# Altium PCB 20240828_VC_MM.PcbDoc
Units mm, origin at the board's own origin, x right, y up, seen from the top; angles counter-clockwise.
Board outline 85 x 55 mm, 2 copper layers (Top Layer, Bottom Layer), stack 0.67 mm thick; 7 components, 6 nets, 20 pads, 2 vias.
Unrouted connection lines stored in the file: 1.
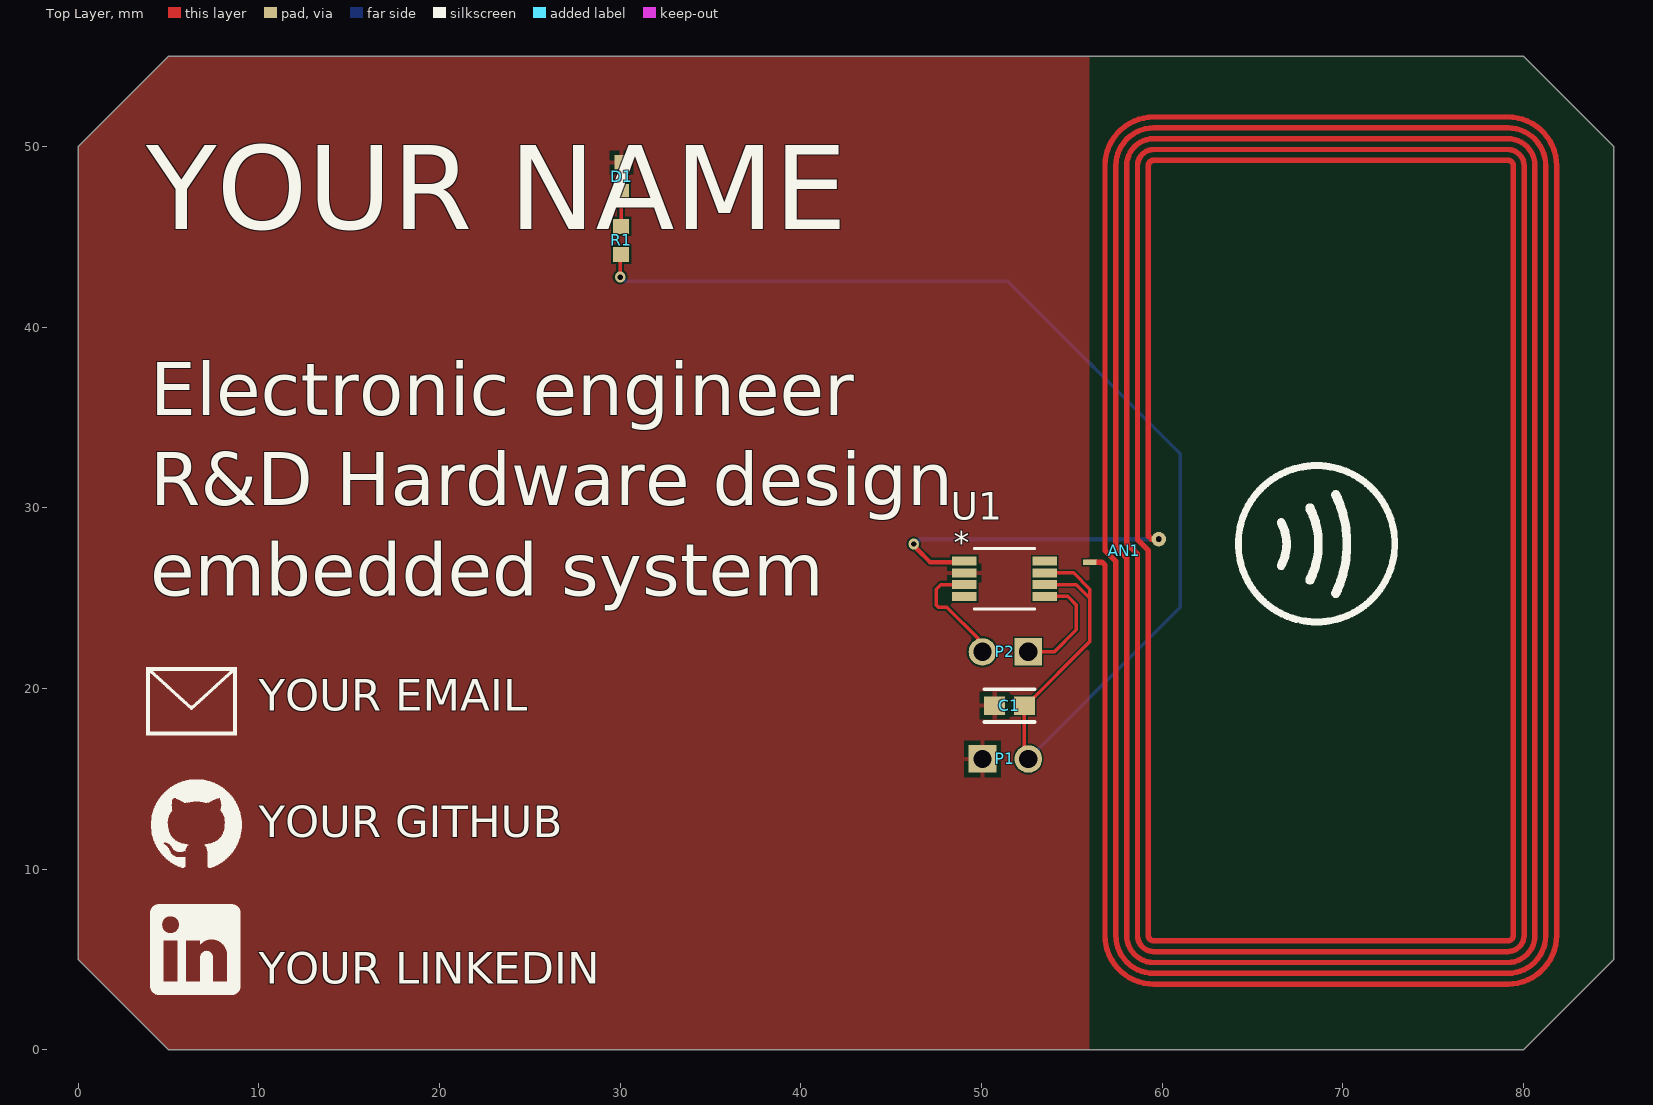
[diagram p0: Top Layer view]
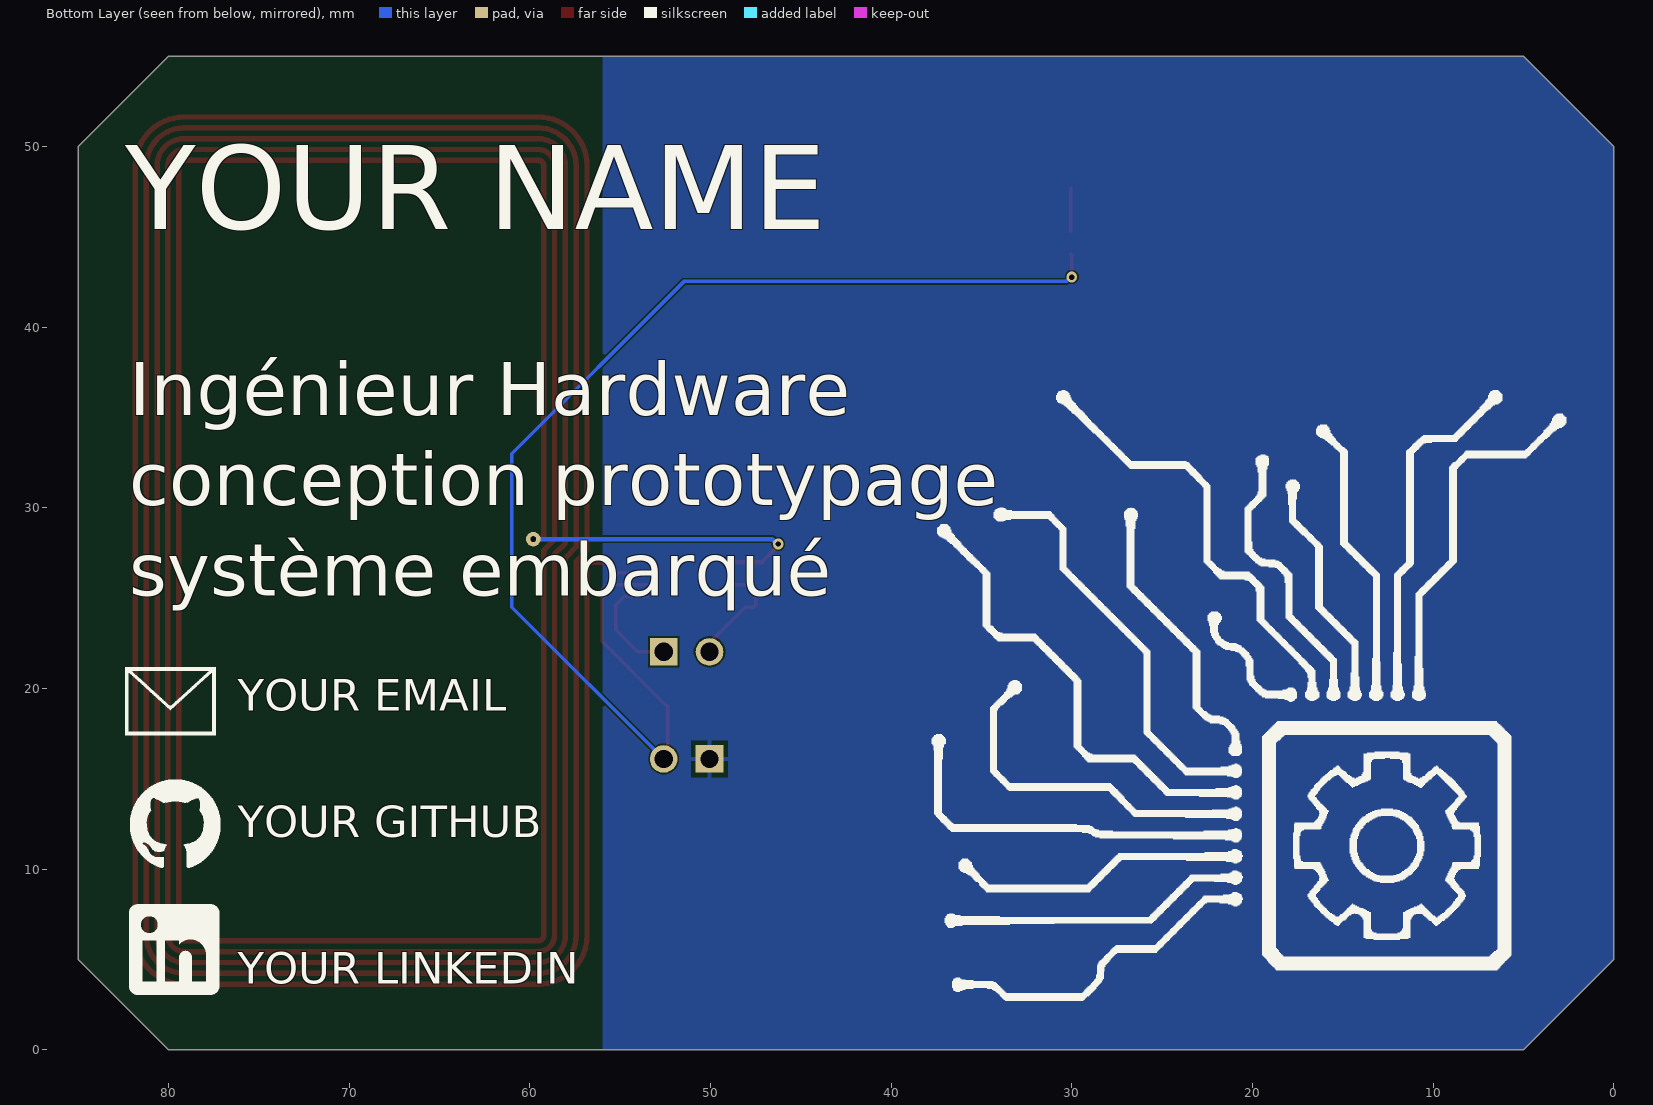
[diagram p1: Bottom Layer view, seen from below]
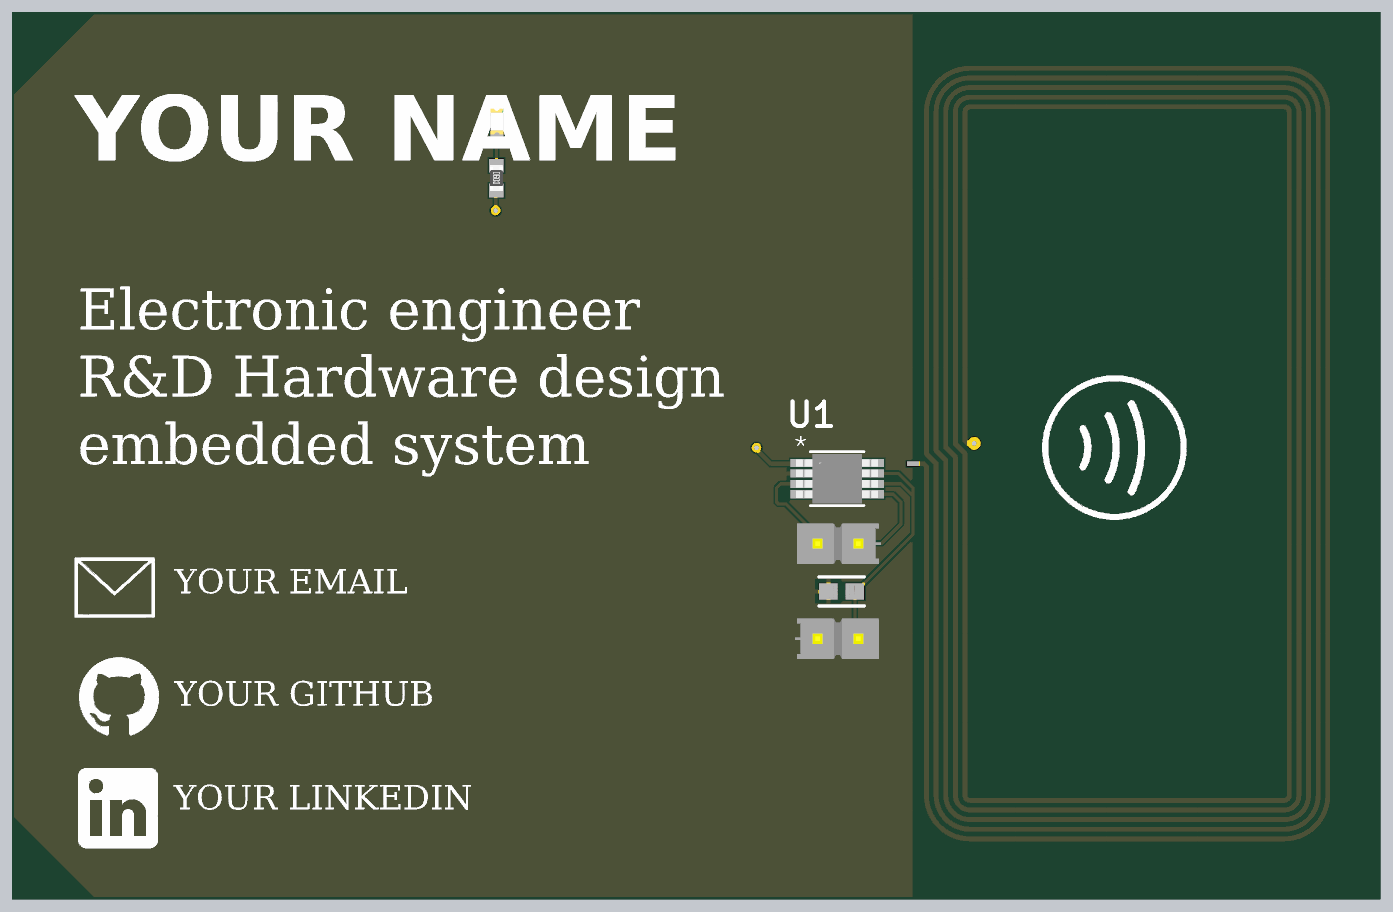
[diagram p2: 3D render of the assembled board from above, using the file's embedded part models]

## Layer stack, top to bottom
Top Solder: solder mask 0.0254, SM-002, Dk 4
Top Layer: signal copper 0.035
Dielectric 1: dielectric 0.6, FR-4, Dk 4.8
Bottom Layer: signal copper 0.035
Bottom Solder: solder mask 0.0254, SM-002, Dk 4

## Board outline
5,0 80,0 85,5 85,50 80,55 5,55 0,50 0,5

## Design rules (kind name [scope] priority, off if disabled: settings)
Clearance [All] p1: gap=0.1 ignorepadtopadclearanceinfootprint=FALSE
HoleSize [All] p1: absolutevalues=TRUE maxlimit=2.54 minlimit=0.15 maxpercent=80.000 minpercent=20.000
HoleToHoleClearance [All] p1: gap=0.2 allowstackedmicrovias=TRUE
MinimumAnnularRing [All] p1: minimumring=0.1
MinimumSolderMaskSliver [All] p1: minsoldermaskwidth=0.15
PolygonConnect [All] p1: connectstyle=Relief reliefconductorwidth=0.254 reliefentries=4 polygonreliefangle="90 Angle" airgapwidth=0.254
RoutingVias [All] p1: holewidth=0.711 width=1.27 viastyle="Through Hole" minholewidth=0.711 minwidth=1.27 maxholewidth=0.711 maxwidth=1.27
SilkToSilkClearance [All] p1: silktosilkclearance=0.1
SolderMaskExpansion [All] p1: expansion=0.038 istentingtop=FALSE
SupplyNets "Schematic Supply Nets_1" [InNet('VCC')] p1: voltage=0.000
SupplyNets "Schematic Supply Nets" [InNet('GND')] p2: voltage=0.000
Width [All] p1: maxlimit=3 minlimit=0.16 preferedwidth=0.2 minimp=50.000000 maximp=50.000000 favimp=50.000000
26 further rules are at their usual default settings.

## Components (designator, comment, footprint, x,y, rotation, side; value= is the part's Value field where it differs from the comment)
AN1 "NFC" NFC_Antenna 86.858,3.612 r90 top
C1 "CC0603JRNPO9BN100" FP-CL10-IPC_A 51.55,19.05 r0 top value=10pF
D1 "150060BS75000" WL-SMCW_0603_H=0.7mm 30.075,48.325 r270 top
P1 "STL1X02" TSW-102-07-XXX-S 51.325,16.1 r0 top
P2 "STL1X02" TSW-102-07-XXX-S 51.325,22.025 r180 top
R1 "RG1608P-470-B-T5" "RESC1608X06N 0603 Medium Density" 30.05,44.8 r270 top value=47
U1 "NT3H2111W0FTTJ" TSSOP_1W0FTTJ_NXP 51.271,26.075 r0 top

## Footprints (in the part's own frame and the unit in brackets; to place one, negate y for a bottom-side part, rotate by r counter-clockwise, add the part's x,y. Pads: shape width x height; smd on the part's side, far side on the other; paste and mask are expansions set on the pad)
FP-CL10-IPC_A [mm] "CAP 0603 Low Density"
  rect 1.158x1.012 smd: 1(-0.827,0) 2(0.827,0)
  silkscreen extent -1.41,-0.91 1.41,0.91, body extent -1.91,-1.01 1.91,1.01, height 0.25
NFC_Antenna [mm]
  rect 0.3x0.75 smd paste+0 mask+0.051: P$1(23.388,30.858)
  round 0.808 hole 0.3 paste-2539.97 mask+0.051: P$2(24.658,27.048)
  Top Layer lines w0.3: 23.388,30.985 23.388,30.858 23.388,30.188 23.223,30.023 2.723,30.023 ccw(c2.723,27.323) 0.023,27.323 0.023,7.723 ccw(c2.723,7.723) 2.723,5.023 ; 24.658,27.048 24.658,27.458 24.823,27.623 45.323,27.623 cw(c45.323,27.323) 45.623,27.323 45.623,7.723 cw(c45.323,7.723) 45.323,7.423 2.723,7.423 cw(c2.723,7.723) 2.423,7.723 2.423,27.323 cw(c2.723,27.323) 2.723,27.623 24.023,27.623 24.623,28.223 45.323,28.223 cw(c45.323,27.323) 46.223,27.323 46.223,7.723 cw(c45.323,7.723) 45.323,6.823 2.723,6.823 cw(c2.723,7.723) 1.823,7.723 1.823,27.323 cw(c2.723,27.323) 2.723,28.223 23.823,28.223 24.423,28.823 45.323,28.823 ; 2.723,5.023 45.323,5.023 ; 45.323,5.023 ccw(c45.323,7.723) 48.023,7.723 48.023,27.323 ccw(c45.323,27.323) 45.323,30.023 24.023,30.023 23.423,29.423 2.723,29.423 ccw(c2.723,27.323) 0.623,27.323 0.623,7.723 ccw(c2.723,7.723) 2.723,5.623 45.323,5.623 ccw(c45.323,7.723) 47.423,7.723 47.423,27.323 ccw(c45.323,27.323) 45.323,29.423 24.223,29.423 23.623,28.823 2.723,28.823 ccw(c2.723,27.323) 1.223,27.323 1.223,7.723 ccw(c2.723,7.723) 2.723,6.223 45.323,6.223 ccw(c45.323,7.723) 46.823,7.723 46.823,27.323 ccw(c45.323,27.323) 45.323,28.823 ; 45.323,28.823 45.323,28.823
"RESC1608X06N 0603 Medium Density" [mm] "Chip Resistor, 2-Leads, Body 1,60x0,80mm, IPC Medium Density"
  rect 0.85x0.9 smd: 1(-0.775,0) 2(0.775,0)
  body extent -0.8,-0.4 0.8,0.4, height 0.45
TSSOP_1W0FTTJ_NXP [mil]
  rect 53.5x20 smd paste+0 mask+0: 1(-87.75,38.38) 2(-87.75,12.8) 3(-87.75,-12.8) 4(-87.75,-38.38) 5(87.75,-38.38) 6(87.75,-12.8) 7(87.75,12.8) 8(87.75,38.38)
  silkscreen extent -66,-66 66,66, body extent -101,-61 101,61, height 43
TSW-102-07-XXX-S [mil]
  rect 60x60 hole 40: 1(-50,0)
  round 60 hole 40 mask+3: 2(50,0)
  body extent -105,-50 100,50, height 330
WL-SMCW_0603_H=0.7mm [mm] "SMD Mono-color Chip LED, body 1.6x0.8mm"
  rect 0.8x0.8 smd: 1(-0.8,0) 2(0.8,0)
  body extent -0.8,-0.4 0.8,0.4, height 0.7

## Part data
AN1: library part antenna
C1: library part CMP-001-00012-12, "CAP, MLCC, C0G/NP0, 10PF, 50V,0603", Capacitance=10pF, Case Code (Imperial)=0603, Case Code (Metric)=1608, Dielectric=C0G, Insulation Resistance=100GR, Max Operating Temperature=125°C, Min Operating Temperature=-55°C, Package Quantity=1, Resistor Type=Ceramic, Temperature Coefficient=30ppm/°C, Tolerance=5%, Voltage=50V, Case/Package=0603, Depth=0.8mm, Height=0.8mm, Lead Free="Lead Free", Length=1.6mm, Mount="Surface Mount", Number of Pins=2, Packaging="Tape and Reel", Radiation Hardening=No, REACH SVHC="No SVHC", RoHS Compliant=Yes, Series=CC, Termination=SMD/SMT, Thickness=0.035inch, Voltage Rating=50V, Voltage Rating (DC)=50V, Width=0.031inch
D1: library part CMP-029-000002-2, "WL-SMCW SMT Mono-color Chip LED Waterclear, size 0603, Blue, 3.2V, 140deg", Emitting Color=Blue, Forward Voltage typ.=3.2V, Operating Temperature="-40 to +85degC", Chip Technology=InGaN, ComponentLink1Description=Manufacturer, ComponentLink1URL=http://www.we-online.de, ComponentLink2Description=Datasheet, ComponentLink2URL=https://www.we-online.com/catalog/datasheet/150060BS75000.pdf, Design Item ID=150060BS75000, Dominant Wavelength typ.=470nm, Luminous Intensity typ.=145mcd, Mounting Technology=SMT, Packaging="Tape and Reel", Part Number=150060BS75000, Peak Wavelength typ.=465nm, Published Date="December 2019", Publisher="Wurth Elektronik", Size=0603, Source=WL-SMCW_0603.SchLib, Viewing Angle=140deg
P1 P2: library part CMP-061-000008-4, "Stiftleiste, 2-Pin", Component Type=Standard, Design Item ID=STL1X02, Pin Count=2, Source=Pin_Header.SchLib
R1: library part CMP-009-00043-3, "Thin Film Resistors - SMD 1/10W 47h Ohms 0.1% 0603 25ppm", Case Code (Imperial)=0603, Case Code (Metric)=1608, Max Operating Temperature=155°C, Max Power Dissipation=100mW, Min Operating Temperature=-55°C, Package Quantity=5000, Power Rating=62.5mW, Resistance=47R, Resistor Type="Thin Film", Temperature Coefficient=25ppm/°C, Tolerance=0.1%, Voltage Rating=75V, Working Voltage=100V, Case/Package=0603, Construction=Rectangular, Depth=0.8mm, Features="Automotive AEC-Q200,Anti-Sulfur", Height=0.4mm, Lead Free="Lead Free", Length=1.6mm, Military Standard=Not, Number of Terminations=2, Packaging="Tape and Reel", RoHS Compliant=Yes, Series=RG, Size Code=0603, Technology="THIN FILM", Termination=SMD/SMT, Voltage Rating (DC)=75V, Weight=7.1E-05oz, Width=0.8mm
U1: "No Description Available", Mfr_Name=NXP, RefDes=RefDes, Type=Type

## Via types
v1: diameter 0.6, hole 0.3, Top Layer to Bottom Layer, 2 vias

## Nets (pads, with @x,y where several pads share a name; then routed paths per layer and width w, separated by ;. In a path a pad name is that pad's centre, name@x,y a point inside that pad or via, vN(x,y) a via of type N, cw(c..) or ccw(c..) an arc to the next point about the centre after c; other vN are vias at no path point)
GND: C1.1 D1.1 P1.1 U1.2
LA: AN1.P$1 AN1.P$2 U1.1 U1.8 | length 17
  Top Layer w0.254: v1(46.25,28) 46.25,27.906 46.423,27.733 46.423,27.726 47.149,27 48.992,27 U1.1
  Bottom Layer w0.254: v1(46.25,28) 46.302,28 46.572,28.27 AN1.P$2
NetD1_2: D1.2 R1.1 | length 2.4
  Top Layer w0.2: R1.1@30.05,45.325 D1.2@30.05,47.694
SCL: P2.2 U1.3 | length 6.4
  Top Layer w0.2: U1.3 47.75,25.75 47.5,25.5 47.5,24.617 47.617,24.5 48.079,24.5 49.802,22.777 49.802,22.278 P2.2
SDA: P2.1 U1.5 | length 6.5
  Top Layer w0.2: P2.1 52.61,22.04 54.04,22.04 55.25,23.25 55.25,24.622 54.772,25.1 U1.5
VCC: C1.2 P1.2 R1.2 U1.6 U1.7 | length 73.5
  Top Layer w0.2: v1(30,42.775) 30,44 30.025,44.025 R1.2 ; P1.2@52.095,16.1 52.095,16.458 52.377,16.74 C1.2 52.45,19.05 56,22.6 56,25 ; U1.6 55.25,25.75 56,25 ; U1.7 55.1,26.4 56,25.5 56,25
  Bottom Layer w0.2: v1(30,42.775) 30.075,42.775 30.317,42.533 51.467,42.533 61,33 61,24.505 P1.2
pads on no net: U1.4

## Polygon pours and split planes (outlines as drawn)
GND on Top Layer "NONET_L01_P-001" (solid, pour order 0): 5,55 0,50 0,5 5,0 55.975,0 55.975,55
GND on Bottom Layer "NONET_L01_P-001" (solid, pour order 1): 5,55 0,50 0,5 5,0 55.975,0 55.975,55

## Silkscreen, mask and mechanical layers (free items; w line width, h text height)
Top Overlay:
  drawing of 7 lines, arcs and shapes, not listed
  text "YOUR NAME" at 3.775,43.893 h8
  text "Electronic engineer / R&D Hardware design / embedded system" at 4,24.171 h5
  text "YOUR EMAIL" at 10.003,18.181 h3
  text "YOUR GITHUB" at 10.003,11.181 h3
  text "YOUR LINKEDIN" at 10,3.082 h3
Bottom Overlay:
  drawing of 21 lines, arcs and shapes, not listed
  text "YOUR NAME" at 82.395,43.893 h8
  text "Ingénieur Hardware / conception prototypage / système embarqué" at 82.17,24.171 h5
  text "YOUR EMAIL" at 76.167,18.181 h3
  text "YOUR GITHUB" at 76.167,11.181 h3
  text "YOUR LINKEDIN" at 76.17,3.082 h3
Board Shape:
  the board outline again, w0.254

## Text inside footprints (layer, text, board x,y; h text height)
U1: Top Overlay "*" at 48.471,27.431 h1.27; Top 3D Body "*" at 49.785,26.278 h1.27